# EAGLE board JUNI PCB (EAGLE 7.7.0)
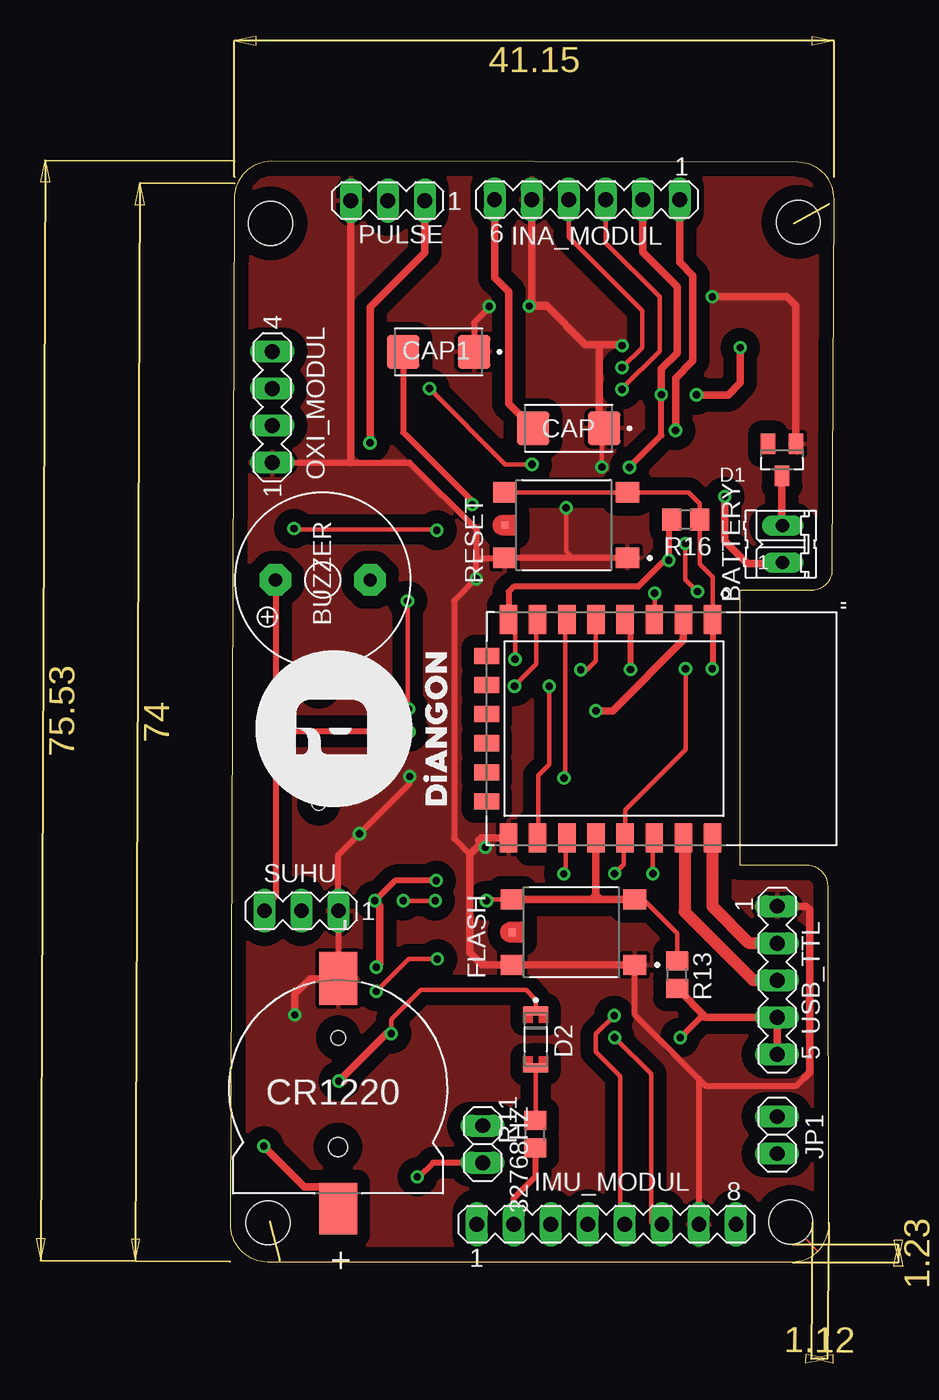
[diagram p0: board, top side]
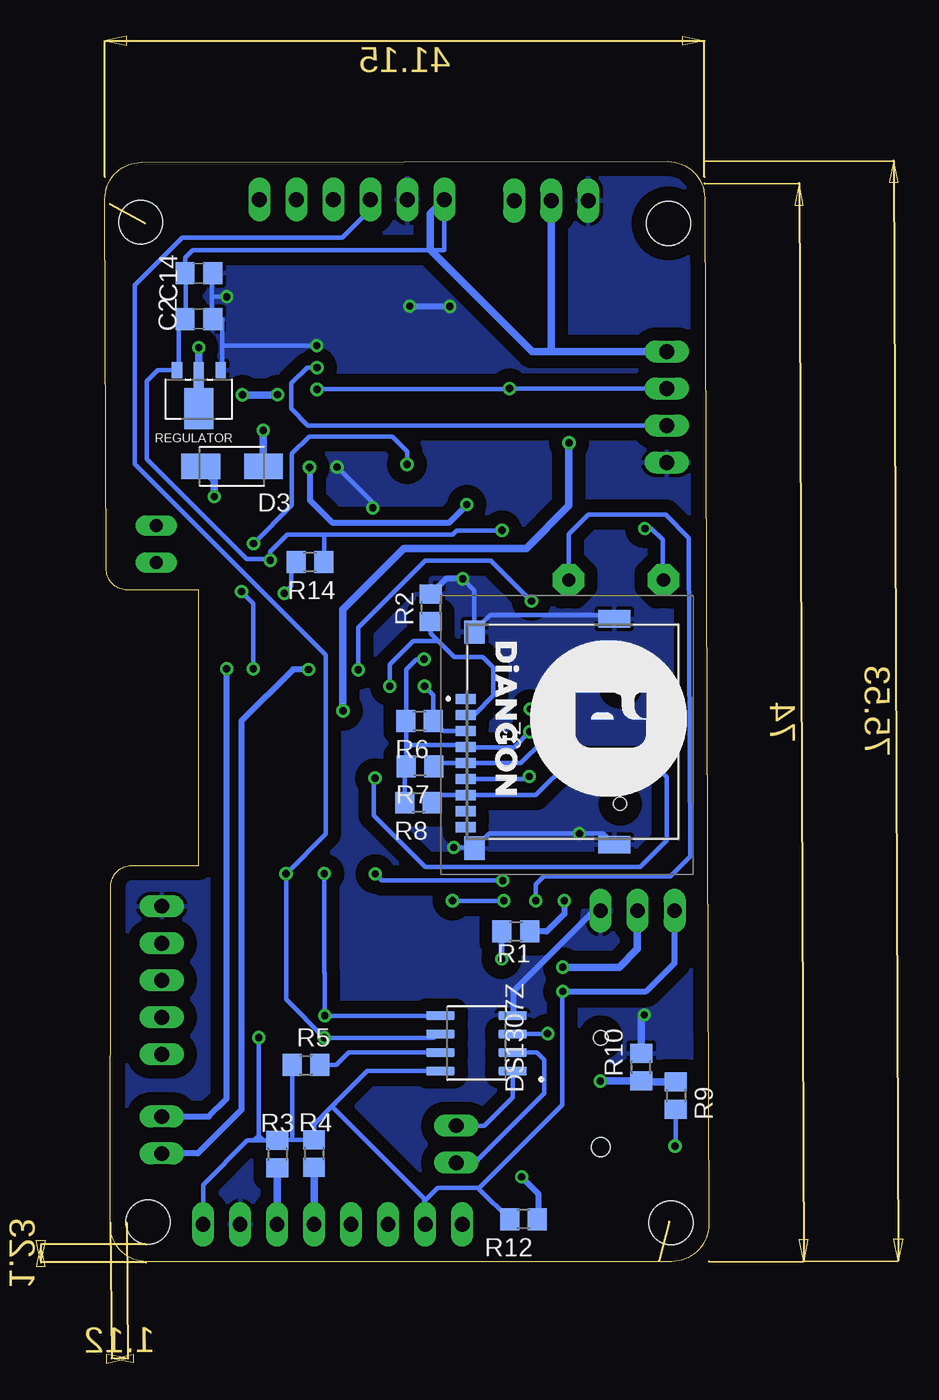
[diagram p1: board, bottom side, seen from below]

Size 41.44 x 75.52 mm. Coordinates in mm from the lower left corner, seen from the top.
Outline: 35,46.11 39.9,46.11 arc90 41.33,47.47 41.44,72.95 arc90 38.95,75.45 2.82,75.52 arc90 0.29,73.01 0,2.57 arc90 2.56,0 38.59,0 arc90 41.08,2.49 41.03,25.78 arc90 39.63,27.18 35,27.18 35,46.11
Copper layers (1*16): Top 0.035mm / dielectric 1.5mm / Bottom 0.035mm
Design rules "default *": minimum track width 0.3mm, minimum drill 0.5mm, track to track 0.2mm, track to pad 0.2mm, pad to pad 0.2mm, via to via 0.2mm, smd to smd 0.2mm, copper to edge 40mil, drill to drill 6mil, minimum pad ring 10mil, minimum via ring 8mil, stop-mask expansion 4mil, vias tented up to drill 0mil, thermal gap 10mil
Holes 3 mm at 38.48,2.71 2.6,2.65 38.98,71.36 2.77,71.27

## Footprints (pad centres in the part's own frame; a part is rotated, then mirrored left to right if it is on the bottom)
1X02 = drill 1.016 long: 1 -1.27,0; 2 1.27,0
XCVR_ESP8266-12E/ESP-12E = smd 2 x 1.2: 1 -7.5,7; 2 -7.5,5; 3 -7.5,3; 4 -7.5,1; 5 -7.5,-1; 6 -7.5,-3; 7 -7.5,-5; 8 -7.5,-7; 15 7.5,-7; 16 7.5,-5; 17 7.5,-3; 18 7.5,-1; 19 7.5,1; 20 7.5,3; 21 7.5,5; 22 7.5,7 | smd 1.1 x 1.7: 9 -5,-8.5; 10 -3,-8.5; 11 -1,-8.5; 12 1,-8.5; 13 3,-8.5; 14 5,-8.5
02P = drill 0.914 long: 1 -1.27,0; 2 1.27,0
F/QMBIII = drill 0.914 pad 2.159 octagon: + 3.251,0; - -3.251,0
C0805 = smd 1.3 x 1.5: 1 -0.95,0; 2 0.95,0
CAPPM6032X280N = smd 2.24 x 2.32: 1 -2.435,0; 2 2.435,0
BAT_BC501SM = smd 3.66 x 2.6: N -7.57,0 | smd 3.54 x 2.6: P 8.23,0 | hole 1: -3.5,0 | hole 1.3: 4,0
SOT23 = smd 1 x 1.4: 1 -0.95,-1.1; 2 0.95,-1.1; 3 0,1.1
DIO_LL4148 = smd 0.6 x 1.65: A 1.95,0; C -1.95,0
DIOM4427X270N = smd 2.65 x 1.75: A 2.15,0; C -2.15,0
SOIC127P600X175-8N = smd 1.97 x 0.59: 1 -2.475,1.905; 2 -2.475,0.635; 3 -2.475,-0.635; 4 -2.475,-1.905; 5 2.475,-1.905; 6 2.475,-0.635; 7 2.475,0.635; 8 2.475,1.905
SW_1-1437565-9 = smd 1.6 x 1.395: 1 -4.205,2.248; 2 4.205,2.248; 3 -4.205,-2.248; 4 4.205,-2.248 | smd 0.5 x 0.5: 5 4.205,0
MA08-1 = drill 1.016 long: 1 -8.89,0; 2 -6.35,0; 3 -3.81,0; 4 -1.27,0; 5 1.27,0; 6 3.81,0; 7 6.35,0; 8 8.89,0
MA06-1 = drill 1.016 long: 1 -6.35,0; 2 -3.81,0; 3 -1.27,0; 4 1.27,0; 5 3.81,0; 6 6.35,0
TF15X15 = smd 0.7 x 1.4: 1 2.475,6.95; 2 1.375,6.95; 3 0.275,6.95; 4 -0.825,6.95; 5 -1.925,6.95; 6 -3.025,6.95; 7 -4.125,6.95; 8 -5.225,6.95; 9 -6.325,6.95 | smd 1.6 x 1.4: MP1 -7.775,6.35; MP2 7.075,6.35 | smd 1.2 x 2.2: MP3 -7.525,-3.25; MP4 7.975,-3.25 | hole 0.9: -4.725,-3.65; 3.275,-3.65
MA04-1 = drill 1.016 long: 1 -3.81,0; 2 -1.27,0; 3 1.27,0; 4 3.81,0
MA03-1 = drill 1.016 long: 1 -2.54,0; 2 0,0; 3 2.54,0
R0805 = smd 1.3 x 1.5: 1 -0.95,0; 2 0.95,0
SOT89R = smd 0.7 x 1.1: 1 -1.5,-1.75; 3 1.5,-1.75 | smd 0.7 x 1.8: 2 0,-1.4 | smd 2 x 2.8: 4 0,0.9
MA05-1 = drill 1.016 long: 1 -5.08,0; 2 -2.54,0; 3 0,0; 4 2.54,0; 5 5.08,0

## Placement (x,y rotation side)
32768HZ  [1X02]  17.33,8.06 270 top
"  [XCVR_ESP8266-12E/ESP-12E]  26.11,36.58 270 top
BATTERY  - +  [02P]  37.92,49.25 90 top
BUZZER  [F/QMBIII]  6.37,46.79 180 top
C2  0.1uf  [C0805]  35,67.84 180 bottom
C14  0.1uF  [C0805]  35,64.7 0 bottom
CAP  [CAPPM6032X280N]  23.23,57.2 180 top
CAP1  [CAPPM6032X280N]  14.31,62.45 180 top
CR1220  [BAT_BC501SM]  7.42,11.87 270 top
D1  BAT54  [SOT23]  37.87,55.03 180 top
D2  LL4148  [DIO_LL4148]  20.97,15.25 270 top
D3  SS12  [DIOM4427X270N]  32.72,54.58 180 bottom
DS1307Z  [SOIC127P600X175-8N]  15.95,14.99 180 bottom
FLASH  [SW_1-1437565-9]  23.57,22.61 180 top
IMU_MODUL  3V3  [MA08-1]  25.82,2.56 0 top
INA_MODUL  3V3  [MA06-1]  24.5,72.9 180 top
J2  TF-15X15  [TF15X15]  9.73,36.14 90 bottom
JP1  [1X02]  37.54,8.69 270 top
OXI_MODUL  3V3  [MA04-1]  2.89,58.66 90 top
PULSE  [MA03-1]  10.82,72.83 180 top
R1  10k  [R0805]  13.25,22.65 180 bottom
R2  10k  [R0805]  19.08,44.87 90 bottom
R3  3K3  [R0805]  29.62,7.37 270 bottom
R4  3K3  [R0805]  27.09,7.42 270 bottom
R5  3K3  [R0805]  27.65,13.5 0 bottom
R6  [R0805]  19.85,37.1 180 bottom
R7  [R0805]  19.82,33.99 180 bottom
R8  [R0805]  19.92,31.5 180 bottom
R9  510k  [R0805]  2.27,11.39 270 bottom
R10  1.5M  [R0805]  4.65,13.35 90 bottom
R11  200  [R0805]  20.94,8.74 90 top
R12  N/A  [R0805]  12.73,2.91 180 bottom
R13  10k  [R0805]  30.68,19.69 90 top
R14  10k  [R0805]  27.38,48.01 180 bottom
R16  10k  [R0805]  31.27,50.93 180 top
REGULATOR  [SOT89R]  35,59.44 180 bottom
RESET  [SW_1-1437565-9]  23.06,50.55 180 top
SUHU  [MA03-1]  4.9,24.08 180 top
USB_TTL  3v3 GND  [MA05-1]  37.54,19.31 270 top

## Library data of the parts
32768HZ JP1 = pinhead
" = ESP8266-12E_ESP-12E (1); AVAILABILITY: Unavailable; DESCRIPTION: This WiFi module has a 32-bit MCU micro and clock speeds supporting 80 MHz or 160 MHz. Supports the RTOS and integrated Wi-Fi MAC/BB/RF/PA/LNA, and has an on-board antenna.; MF: AI-Thinker; MP: ESP8266-12E/ESP-12E; PACKAGE: None; PRICE: None
BATTERY = con-amp-quick; OC_FARNELL: unknown; OC_NEWARK: unknown
BUZZER = buzzer; OC_FARNELL: unknown; OC_NEWARK: unknown
C2 C14 = rcl; SPICEPREFIX: C
CAP CAP1 = 100uf10v_C_Case
CR1220 = CR1220HOLDER; AVAILABILITY: Good; DESCRIPTION: BATTERY HOLDER COIN 12MM SMD; MF: MPD; MP: BC501SM; PACKAGE: DFN-8 MPD; PRICE: None; PURCHASE-URL: https://pricing.snapeda.com/search/part/BC501SM/?ref=eda
D1 = BAT54; AVAILABILITY: In Stock; DESCRIPTION: Diode Array 1 Pair Common Cathode Schottky 30V 200mA (DC) Surface Mount TO-236-3, SC-59, SOT-23-3; MF: ON Semiconductor; MP: BAT54; PACKAGE: SOT-23 Multicomp; PRICE: None
D2 = LL4148; AVAILABILITY: In Stock; DESCRIPTION: Diode Standard 100V 200mA Surface Mount SOD-80; MF: ON; MP: LL4148; PACKAGE: SOD-80 Fairchild Semiconductor; PRICE: None
D3 = SS12; AVAILABILITY: No availability data; DESCRIPTION: N-Channel 100V 170mA (Ta) 225mW (Ta) Surface Mount SOT-23-3 (TO-236); MF: Klein Tools,; MP: SS12; PACKAGE: DO-214AC-214 ON Semiconductor; PRICE: None
DS1307Z = DS1307Z_; AVAILABILITY: Warning; DESCRIPTION: Real Time Clock (RTC) IC Clock/Calendar 56B I²C, 2-Wire Serial 8-SOIC (0.154, 3.90mm Width); MF: Maxim Integrated; MP: DS1307Z+; PACKAGE: SOIC-8 Maxim; PRICE: None; PURCHASE-URL: https://pricing.snapeda.com/search/part/DS1307Z+/?ref=eda
FLASH RESET = buttonsmd5; AVAILABILITY: Warning; COMMENT: 1-1437565-9; DESCRIPTION: Tactile Switch SPST-NO Top Actuated Surface Mount; MF: TE Connectivity; MP: 1-1437565-9; PACKAGE: SMD-6 Omron Electronics; PRICE: None
IMU_MODUL OXI_MODUL PULSE SUHU USB_TTL = con-lstb; OC_FARNELL: unknown; OC_NEWARK: unknown
INA_MODUL = con-lstb@1; OC_FARNELL: unknown; OC_NEWARK: unknown
J2 = TF-15X15; DESCRIPTION: Micro-SD Card Socket; HEIGHT: 1.85mm; MANUFACTURER_NAME: SOFNG; MANUFACTURER_PART_NUMBER: TF-15X15
R1-R14 R16 = rcl; SPICEPREFIX: R
REGULATOR = MCP1700T-3302E_TT (1); AVAILABILITY: Good; DESCRIPTION: IC REG LINEAR 3.3V 250MA SOT23-3; MF: Microchip Technology; MP: MCP1700T-3302E/TT; PACKAGE: None; PRICE: None; PURCHASE-URL: https://pricing.snapeda.com/search/part/MCP1700T-3302E/TT/?ref=eda

## Nets
3V3 [3v3]: ".8 BUZZER.+ C2.2 C14.1 CAP.2 DS1307Z.8 IMU_MODUL.2 IMU_MODUL.8 INA_MODUL.6 J2.4 OXI_MODUL.4 PULSE.2 R1.2 R3.1 R4.1 R5.1 R6.2 R7.2 R8.2 R11.1 R12.2 R13.1 R14.1 R16.2 REGULATOR.3 SUHU.3 USB_TTL.4 USB_TTL.5
A0: ".2 PULSE.1
CS: ".16 J2.2 R2.1
GND [3v3]: ".15 C2.1 C14.2 CAP1.1 CAP.1 CR1220.N D1.1 DS1307Z.4 FLASH.1 FLASH.2 IMU_MODUL.7 INA_MODUL.5 J2.6 J2.MP1 J2.MP2 J2.MP3 J2.MP4 OXI_MODUL.1 PULSE.3 R2.2 R10.2 REGULATOR.1 RESET.1 RESET.2 SUHU.1 USB_TTL.1
GPIO0: ".18 BUZZER.- FLASH.3 FLASH.4 R13.2
GPIO2: ".17 R1.1 SUHU.2
MISO: ".6 J2.7 R8.1
MOSI: ".7 J2.3 R6.1
N$1: DS1307Z.7 R5.2
N$2: CR1220.P R9.2
N$3: ".4 JP1.2
N$4: D2.A R11.2
N$5: D2.C DS1307Z.3 R9.1 R10.1
N$6: BATTERY.2 D1.3
N$7: BATTERY.1 D3.A
N$8: 32768HZ.1 DS1307Z.1
N$9: 32768HZ.2 DS1307Z.2 R12.1
N$20: ".1 JP1.1 R16.1 RESET.3 RESET.4
N$22: ".3 R14.2
RX: ".21 USB_TTL.3
SCL: ".20 DS1307Z.6 IMU_MODUL.6 INA_MODUL.4 OXI_MODUL.2 R3.2
SCLK: ".5 J2.5 R7.1
SDA: ".19 DS1307Z.5 IMU_MODUL.5 INA_MODUL.3 OXI_MODUL.3 R4.2
TX: ".22 USB_TTL.2
V_IN [3v3]: D3.C INA_MODUL.1
V_OUT [3v3]: CAP1.2 INA_MODUL.2 REGULATOR.2

## Tracks (layer width: path | path; a pad name or v marks a point on that pad's centre or on a via)
3V3  (via drill 0.5)
  Top 0.3: v12.28,36.37 12.16,36.37 | 10.04,18.53 v10.03,18.55 12.25,20.77 v14.22,20.77 | v14.19,50.2 14.13,50.26 4.45,50.26 v4.39,50.32 | v19.55,41.34 19.55,43.28 19.11,43.72 19.11,44.2
  Top 0.305: 19.11,44.2 ".8 | 12.39,36.47 v12.28,36.37 | 3.13,34.3 3.13,35.12
  Top 0.406: R16.2 30.1,50.71 v30.1,48.13 29.81,48.13 28.01,46.33 19.47,46.33 19.11,45.96 19.11,44.2 | SUHU.3 2.36,24.33 3.12,25.09 3.12,35.26 3.13,35.24 | 3.13,36.4 3.13,46.77 BUZZER.+ | 3.13,36.4 3.13,35.24 | 3.13,35.24 3.13,35.12 | v12.28,36.37 3.17,36.37 3.13,36.4 | v30.89,15.37 32.28,16.77 32.65,16.77 | R11.1 20.94,5.8 19.45,4.31 19.45,2.59 IMU_MODUL.2
  Top 0.508: R13.1 32.65,16.77 USB_TTL.4 USB_TTL.5 | CAP.2 19.11,58.88 19.11,66.56 18.15,67.52 INA_MODUL.6
  Bottom 0.3: 29.67,8.3 R3.1 | 34.84,2.52 IMU_MODUL.8 | 20.86,37.1 R6.2 | 20.86,37.23 R6.2 | 27.04,8.48 R4.1 | 26.38,49.9 26.38,48.06 R14.1 | 33.09,49.6 33.08,49.6 | 33.08,49.6 31.71,48.23 30.1,48.23 v30.1,48.13 30.1,48.75 28.94,49.9 26.38,49.9 | C2.2 35.89,67.65 35.89,65.05 C14.1 36.39,64.55 36.39,61.37 REGULATOR.3 37.82,61.19 38.56,60.45 38.56,55.08 33.08,49.6 | 26.38,49.9 17.59,49.9 17.3,50.2 v14.19,50.2 | 2.98,46.66 BUZZER.+ 3.18,46.85 3.18,49.55 3.95,50.32 v4.39,50.32 | 28.67,8.37 29.22,8.37 R3.1 | 28.67,8.37 R4.1 | 25.62,10.91 25.87,10.65 | 26.78,8.65 27.06,8.37 R4.1 | 25.87,10.65 19.53,4.31 19.53,2.62 IMU_MODUL.2 19.47,4.19 18.6,5.07 15.74,5.07 | 30.89,8.37 30.89,8.64 v30.89,15.37 | 29.72,8.37 R3.1 | R7.2 20.87,33.88 R8.2 | 17.17,35.43 J2.4 | 20.36,36.62 R6.2 | R6.2 20.77,37.11 20.77,40.64 20.07,41.34 v19.55,41.34 | J2.4 16.82,35.46 20.77,35.46 R7.2 | R6.2 20.77,37.1 R7.2 | v12.28,36.37 13.36,35.29 16.65,35.29 J2.4 | 15.74,5.07 10.05,10.76 10.05,17.06 10.05,17.07 10.05,18.52 v10.03,18.55 | 14.2,22.43 R1.2 | R5.1 28.6,8.44 28.67,8.37 | 25.92,10.61 27.09,9.43 R4.1 | 25.92,10.61 25.57,10.95 | 25.87,10.65 25.92,10.61 | 25.92,10.61 | 15.74,5.07 15.74,4.97 R12.2
  Bottom 0.305: IMU_MODUL.8 34.71,5.28 31.67,8.32 31.19,8.32 | 31.19,8.32 30.57,8.32 | 31.19,8.32 31.19,8.34 30.89,8.64 30.57,8.32 | 30.57,8.32 R3.1 | DS1307Z.8 23.44,13.09 25.57,10.95 | INA_MODUL.6 18.15,69.42 35.43,69.42 35.95,68.91 C2.2
  Bottom 0.406: SUHU.3 2.36,20.49 4.3,18.55 v10.03,18.55 | v14.22,20.77 14.2,20.79 14.2,22.43
  Bottom 0.508: OXI_MODUL.4 10.74,62.47 | 10.74,62.47 12.12,62.47 19.13,69.47 19.13,71.93 INA_MODUL.6 | PULSE.2 10.82,62.55 10.74,62.47
A0  (via drill 0.5)
  Top 0.508: PULSE.1 13.36,69.27 9.6,65.51 v9.6,56.2 | ".2 31.11,42.67 26.24,37.8 v25.1,37.8
  Bottom 0.508: v9.6,56.2 9.6,51.89 12.54,48.95 20.94,48.95 25.13,44.76 25.13,37.84 v25.1,37.8
CS  (via drill 0.5)
  Top 0.3: 21.02,29.13 ".16 21.13,29.05 21.13,33.36 21.89,34.13 v21.89,39.49
  Bottom 0.3: v21.89,39.49 21.89,40.99 20.29,42.6 | J2.2 16.11,37.52 14.78,38.84 14.78,40.76 15.51,41.49 17.46,41.49 18.56,42.58 | 20.29,42.6 19.66,42.6 | 18.56,42.58 20.27,42.58 20.29,42.6 | 19.08,43.8 R2.1 19.08,43.11 18.56,42.58
GND  (via drill 0.5)
  Top 0.3: 32.08,2.65 IMU_MODUL.7 | 18.9,48.38 RESET.2 18.49,48.3 | 27.2,48.38 RESET.1 | 19.41,20.45 FLASH.2 19.41,20.58 | 27.71,20.45 FLASH.1 | 19.01,29.01 ".15 | 7.44,19.37 7.41,19.34 | 23.5,48.3 23.06,48.75 v23.06,51.73 | 25.5,57.66 25.5,57.3 | v25.51,54.54 25.5,54.52 25.5,57.3 | 25.47,57.66 25.47,57.39 CAP.1 25.59,57.2 25.5,57.3 | 25.34,58.27 25.75,57.87 25.75,57.66
  Top 0.305: CR1220.N 7.36,19.38
  Top 0.406: USB_TTL.1 39.57,24.39 39.78,24.17 | 39.43,12.65 38.81,12.03 32.69,12.03 32.17,12.54 | 32.17,12.54 IMU_MODUL.7 | 32.17,12.54 27.78,16.94 FLASH.1 | RESET.1 23.5,48.3 18.98,48.3 18.9,48.38 | 25.47,57.54 25.47,57.66 25.5,57.66 | 18.49,48.3 16.92,48.3 16.89,48.27 | 16.45,27.95 15.37,29.03 15.37,45.36 v16.89,46.87 16.89,48.27 | v26.9,62.88 26.76,62.88 | 16.89,48.27 16.89,50.27 12.31,54.85 8.25,54.85 OXI_MODUL.1 | 7.44,19.37 SUHU.1 7.44,27.92 v8.89,29.37 12.32,32.81 v12.32,33.3 | v17.79,65.57 17.79,65.48 16.75,64.44 CAP1.1
  Top 0.508: FLASH.1 FLASH.2 17.3,20.36 16.45,21.21 16.45,27.95 17.6,29.09 17.24,29.09 17.24,29.08 | v26.9,62.88 26.83,62.95 25.34,62.95 | 25.34,62.95 24.38,62.95 21.68,65.65 20.59,65.65 v20.53,65.59 | 25.34,62.95 25.34,58.27 25.34,57.52 CAP.1 | 17.24,29.08 17.05,28.89 v17.51,28.43 | 17.24,29.08 ".15 | v4.43,16.93 4.43,18.36 5.49,19.41 7.33,19.41 7.36,19.38 7.41,19.34 | v33.09,66.23 38.21,66.23 38.82,65.61 D1.1 | 21.7,65.59 v20.53,65.59 | PULSE.3 8.28,54.88 8.25,54.85 | INA_MODUL.5 20.69,65.75 v20.53,65.59 | USB_TTL.1 39.55,24.39 39.77,24.17 39.77,12.99 39.43,12.65
  Bottom 0.3: 13.42,16.91 DS1307Z.4 | 33.39,62.88 33.39,64.7 C14.2 34.13,64.79 34.13,66.23 | 33.39,62.88 33.39,61.37 REGULATOR.1 | 34.13,66.23 34.13,67.79 C2.1 | 33.39,62.88 v26.9,62.88 | J2.MP2 16.08,43.28 15.06,44.3 | 15.06,44.3 14.89,44.37 | J2.MP4 6.72,44.37 14.99,44.37 15.06,44.3 | 15.61,43.46 J2.MP2 | J2.6 16.66,33.14 12.48,33.14 v12.32,33.3 | v23.06,51.73 23.06,52.09 v25.51,54.54 | v17.51,28.43 16.15,28.43 J2.MP1 15.08,29.37 v8.89,29.37 7.23,29.37 J2.MP3 | v16.89,46.87 16.08,46.07 J2.MP2 | v33.09,66.23 34.13,66.23
  Bottom 0.406: v16.89,46.87 18.03,46.87 R2.2 | SUHU.1 7.9,24.08 13.43,18.56 13.43,16.92 13.42,16.91 | v20.53,65.59 20.51,65.57 v17.79,65.57
  Bottom 0.508: v4.43,16.93 4.65,16.71 R10.2
  pour Top (isolate 0.9): 41.05,75.59 0.2,75.59 0.2,0.64 0.7,0.14 39.83,0.14 41.09,1.4 41.09,26.29 40.2,27.18 35,27.18 35,46.11 40.08,46.11 41.35,47.38 41.35,75.3
  pour Bottom (isolate 0.9): 0.35,75.68 -0.05,75.28 -0.05,1.02 1.08,-0.11 39.78,-0.11 41.12,1.23 41.12,26.1 39.96,27.26 34.99,27.26 34.99,46.08 34.98,46.1 40.29,46.1 41.33,47.13 41.33,75.08 40.72,75.69 35.55,75.69
GPIO0  (via drill 0.5)
  Top 0.3: 19.41,24.86 FLASH.4 | 25.17,29.01 ".18
  Top 0.305: FLASH.3 28.35,24.86 30.68,22.53 R13.2 | FLASH.4 17.69,24.86 v17.6,24.77 | v14.07,24.77 v11.88,24.77
  Top 0.508: FLASH.3 25.34,24.86 | 19.41,24.86 25.23,24.86 25.11,24.98 25.11,25.15 | FLASH.4 24.81,24.86 | 24.81,24.86 25.34,24.86 | ".18 25.11,25.15 | 25.11,25.15 24.81,24.86 | 25.11,25.15 25.34,24.91 25.34,24.86
  Bottom 0.3: 2.64,26.45 1.27,27.81 1.27,27.88 1.36,49.67 2.97,51.28 8.28,51.28 9.62,49.94 BUZZER.-
  Bottom 0.305: v17.6,24.77 v14.07,24.77 | v11.88,24.77 11.88,25.88 11.32,26.45 2.64,26.45
GPIO2  (via drill 0.5)
  Top 0.3: 23.03,29.13 ".17 23.02,29 23.02,26.74 v22.89,26.61
  Top 0.406: v14.15,26.16 11.35,26.16 9.97,24.77 v9.92,24.77
  Top 0.508: v9.92,24.77 10.27,24.42 10.27,20.45 v10.03,20.2
  Bottom 0.3: v22.89,26.61 22.44,26.16 v14.15,26.16
  Bottom 0.406: v9.92,24.77 9.92,23.86 11.13,22.65 R1.1
  Bottom 0.508: SUHU.2 4.9,21.45 6.14,20.2 v10.03,20.2
MISO  (via drill 0.5)
  Top 0.3: v22.91,33.19 23.01,33.29 23.01,43.99 ".6
  Bottom 0.3: v22.91,33.19 23,33.09 23,30.62 19.47,27.09 | 4.69,27.09 2.89,28.9 2.89,33.25 4.01,34.37 9.51,34.37 11.86,32.02 J2.7 18.66,32.02 18.97,31.71 R8.1
  Bottom 0.305: 19.47,27.09 4.69,27.09
MOSI  (via drill 0.5)
  Top 0.305: ".7 21.03,44 21.03,41.01 v19.51,39.5
  Bottom 0.3: v19.51,39.5 18.9,38.88 R6.1 18.21,36.42 J2.3
N$1
  Bottom 0.3: DS1307Z.7 24.71,14.36 25.57,13.5 R5.2
N$2  (via drill 0.5)
  Top 0.3: 7.01,5.13 8.12,5.13 8.12,4.34 CR1220.P
  Top 0.508: v2.32,7.92 5.11,5.13 7.01,5.13
  Bottom 0.3: R9.2 2.27,7.97 v2.32,7.92
N$3  (via drill 0.5)
  Top 0.406: ".4 27.47,43.71 v27.47,40.65
  Bottom 0.406: v27.47,40.65 28.52,40.65 32.08,37.09 32.08,10.42 35.08,7.42 JP1.2
N$4
  Top 0.3: D2.A 20.97,9.72 R11.2
N$5  (via drill 0.5)
  Top 0.3: v11.06,15.65 11.06,16.62 13.08,18.63 20.32,18.63 20.97,17.98 D2.C
  Top 0.508: 7.8,12.39 v7.45,12.39 10.71,15.65 v11.06,15.65
  Bottom 0.3: 4.6,12.34 R10.1 | DS1307Z.3 11.08,15.63 v11.06,15.65 | v7.45,12.39 7.41,12.34 | 4.46,12.34 4.25,12.34
  Bottom 0.508: R9.1 4.25,12.34 4.6,12.34 | v7.45,12.39 7.44,12.39 R10.1
N$6
  Top 0.508: BATTERY.2 37.87,50.57 D1.3
N$7  (via drill 0.5)
  Top 0.508: v33.94,52.51 33.94,49.46 35.48,47.93 37.86,47.93 BATTERY.1
  Bottom 0.508: D3.A 33.94,53.65 v33.94,52.51
N$8
  Bottom 0.305: DS1307Z.1 13.47,11.27 15.42,9.33 32768HZ.1
N$9  (via drill 0.5)
  Top 0.406: 32768HZ.2 13.92,6.79 12.95,5.82 v12.85,5.82
  Bottom 0.3: 11.28,11.55 15.59,7.24 16.04,6.79 32768HZ.2
  Bottom 0.305: DS1307Z.2 11.8,14.36 11.28,13.84 11.28,11.55
  Bottom 0.406: v12.85,5.82 12.85,5.79 11.7,4.64 11.7,2.98 R12.1
N$20  (via drill 0.5)
  Top 0.3: 27.33,52.79 RESET.3 | 18.9,52.79 RESET.4 | 27.2,52.79 RESET.3 | 33.1,44.11 ".1 33.11,47 | 26.89,52.87 RESET.3
  Top 0.305: 33.11,47 32.22,47.89 R16.1 32.22,52.04 31.46,52.8 RESET.3 RESET.4
  Top 0.406: ".1 33.11,40.71 v33.09,40.69
  Bottom 0.406: v33.09,40.69 33.09,11.18 34.31,9.96 JP1.1
N$22  (via drill 0.5)
  Top 0.3: v29.13,45.87 29.13,44.11 ".3
  Top 0.305: 28.71,44.48 ".3
  Bottom 0.3: 28.44,47.89 R14.2 28.64,47.28 | 28.64,47.9 28.64,47.28 | v29.13,45.87 28.64,46.36 28.64,47.28
RX
  Top 0.813: ".21 31.19,29 31.19,24.01 35.89,19.31 USB_TTL.3
SCL  (via drill 0.5)
  Top 0.3: v26.89,61.37 28.27,62.75 28.27,65.29 23.23,70.33 INA_MODUL.4 | v26.39,15.37 28.89,12.87 28.89,2.71 IMU_MODUL.6 | ".20 29.01,28.99 v29.01,26.62
  Bottom 0.3: 29.67,6.42 R3.2 29.54,6.42 | 23.35,72.79 INA_MODUL.4 | v26.39,15.37 18.89,15.37 DS1307Z.6 | 36.13,70.27 39.39,67.01 39.39,54.73 | v29.01,26.62 26.29,29.35 | OXI_MODUL.2 27.51,57.39 28.66,58.54 28.66,60.28 27.57,61.37 v26.89,61.37 | 26.29,41.63 33.78,49.12
  Bottom 0.305: 33.78,49.12 39.39,54.73 | 26.29,41.63 26.29,29.35 | v29.01,26.62 29.01,18 v26.39,15.37 | 36.13,70.27 25.16,70.27 23.23,72.2 INA_MODUL.4
  Bottom 0.508: R3.2 29.63,6.41 IMU_MODUL.6
SCLK  (via drill 0.5)
  Top 0.3: v24.06,40.62 24.47,40.62 25.11,41.23 ".5
  Top 0.305: v12.18,45.35 12.18,38 v12.25,37.93
  Bottom 0.3: v24.06,40.62 24.06,43.51 19.45,48.12 14.95,48.12 v12.18,45.35 | 11.4,35.72 12.9,34.22 J2.5 18.64,34.22 R7.1
  Bottom 0.305: 11.4,35.72 11.4,37.16 12.17,37.93 v12.25,37.93
SDA  (via drill 0.5)
  Top 0.3: 26.39,16.85 v26.36,16.88 | v26.39,26.63 27.02,27.27 27.02,29 ".19 27.11,30.99 31.26,35.14 v31.26,40.69 | v26.89,59.87 26.89,59.92 29.47,62.5 29.47,66.23 25.77,69.92 INA_MODUL.3 | v32.07,46 31.24,46.83 v31.24,49.28 | v20.71,54.72 18.9,54.72 v13.68,59.93
  Top 0.305: v26.36,16.88 25.09,15.61 25.09,14.38 26.77,12.71 26.77,2.89 IMU_MODUL.5
  Bottom 0.3: 27.17,6.46 R4.2 | 25.87,72.79 INA_MODUL.3 | DS1307Z.5 18.26,16.9 18.24,16.88 v26.36,16.88 | OXI_MODUL.3 v13.68,59.93 13.72,59.9 26.86,59.9 v26.89,59.87 | v31.26,40.69 31.26,45.18 v32.07,46 | v20.71,54.72 20.71,55.61 21.73,56.64 27.42,56.64 28.61,55.45 28.61,51.92 v31.24,49.28
  Bottom 0.305: v26.39,26.63 26.39,19.83 26.36,19.8 v26.36,16.88
  Bottom 0.508: R4.2 IMU_MODUL.5
TX
  Top 0.813: USB_TTL.2 35.63,21.85 33.11,24.37 ".22
V_IN  (via drill 0.5)
  Top 0.508: INA_MODUL.1 30.85,68.61 31.76,67.69 31.76,61.85 30.57,60.66 v30.57,57.05
  Bottom 0.508: 30.91,54.92 D3.C v30.57,57.05
V_OUT  (via drill 0.5)
  Top 0.406: v16.61,51.96 16.61,52.2 11.88,56.93 CAP1.2 | v27.4,54.52 29.6,56.72 v29.6,59.51
  Top 0.508: INA_MODUL.2 28.31,69.29 30.68,66.92 30.68,62.37 29.6,61.29 v29.6,59.51 | v35.01,62.74 35.01,60.33 34.17,59.49 v32.01,59.49
  Bottom 0.406: v16.61,51.96 16.61,51.94 17.86,50.7 25.8,50.7 27.37,52.26 27.37,54.5 v27.4,54.52
  Bottom 0.508: REGULATOR.2 35,62.73 v35.01,62.74 | v32.01,59.49 29.61,59.49 v29.6,59.51
(copper drawn outside any net)
  shapes: Top area x1

## Text on the board
bPlace: E:/DiANGON/Foto/logo diangon2.bmp